# Altium PCB PCB1.PcbDoc
Units mil, origin at the board's own origin, x right, y up, seen from the top; angles counter-clockwise.
Board outline 5815 x 3685 mil, 2 copper layers (Top Layer, Bottom Layer); 31 components, 29 nets, 121 pads, 2 vias.
Unrouted connection lines stored in the file: 1.
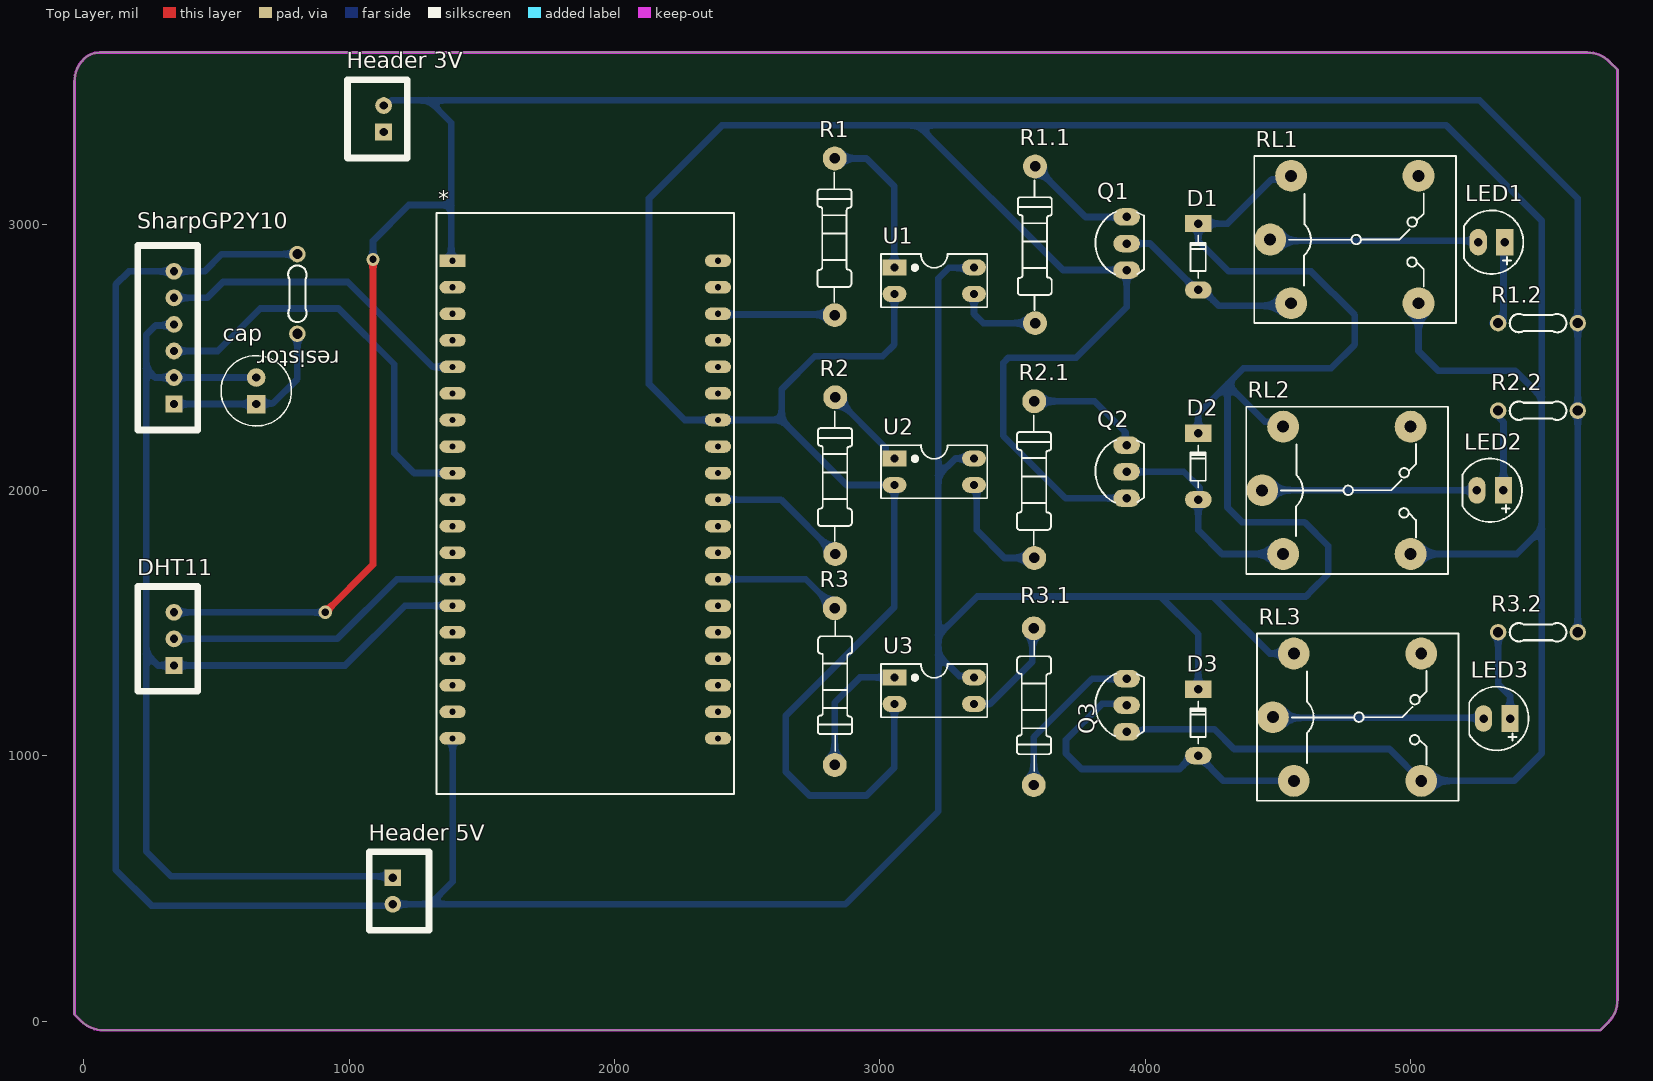
[diagram p0: Top Layer view]
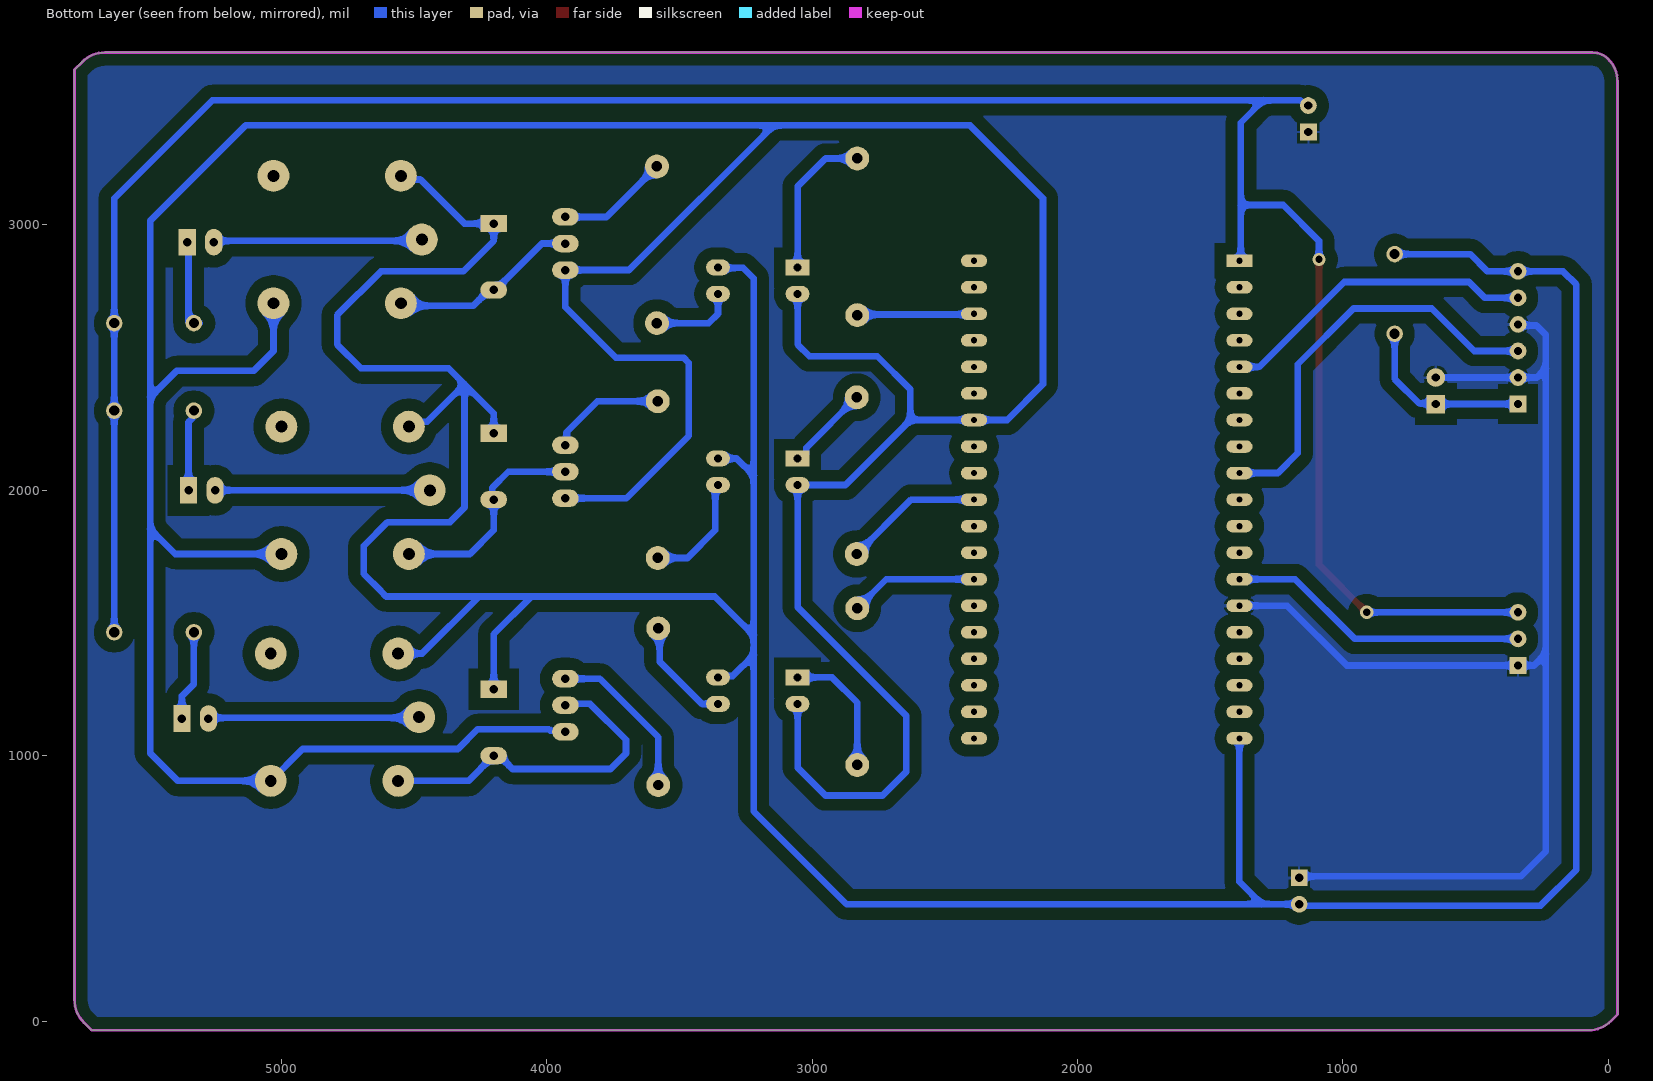
[diagram p1: Bottom Layer view, seen from below]
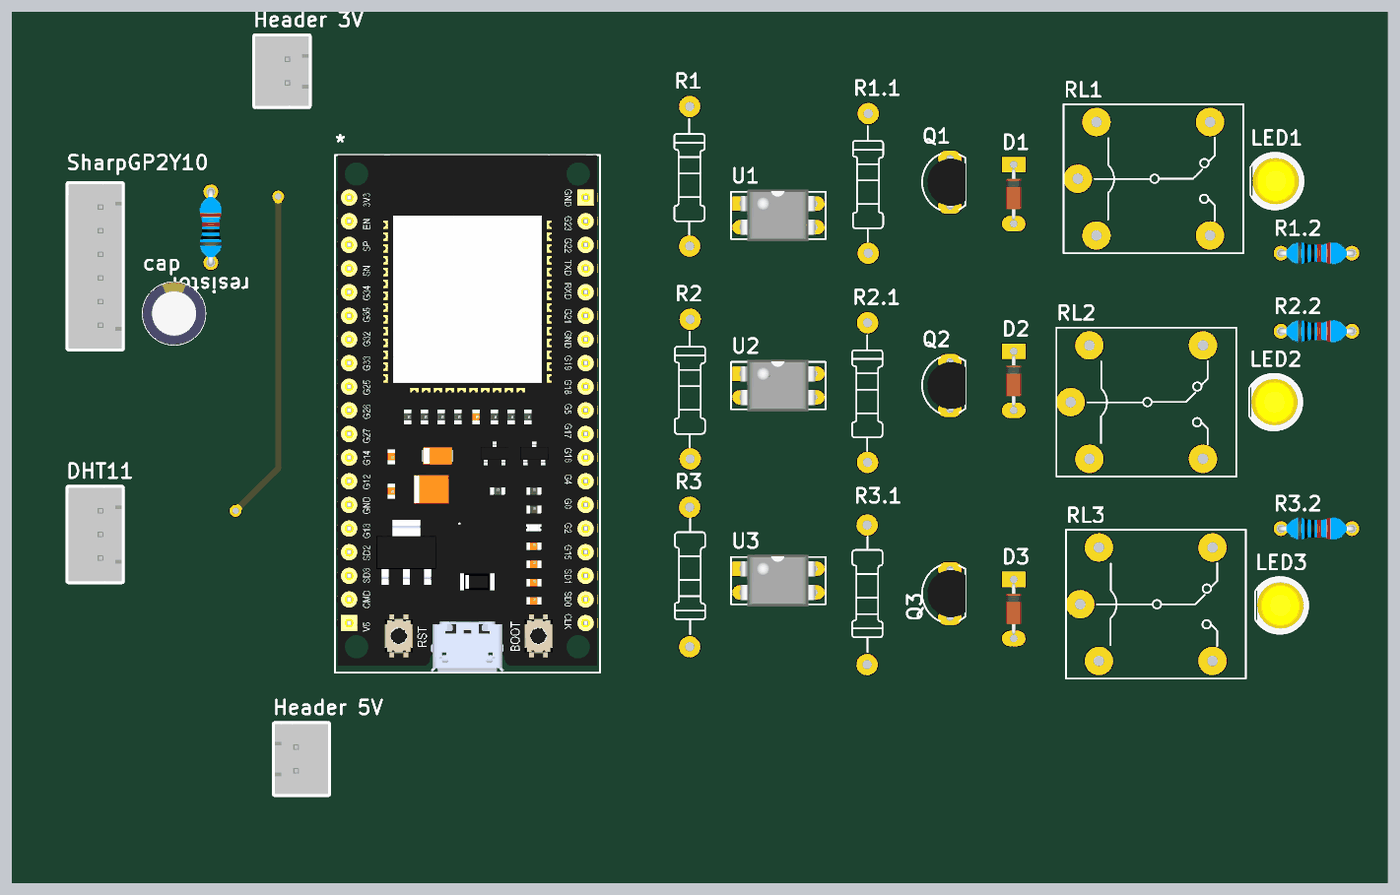
[diagram p2: 3D render of the assembled board from above, using the file's embedded part models]

## Layer stack, top to bottom
Top Solder: solder mask 0.4, Solder Resist, Dk 3.5
Top Layer: signal copper 1.4
Dielectric 1: dielectric 12.6, FR-4, Dk 4.8
Bottom Layer: signal copper 1.4
Bottom Solder: solder mask 0.4, Solder Resist, Dk 3.5

## Board outline
-35,25 -35,3540 cw(c85.71,3540) 0.36,3625.36 cw(c59.85,3565.86) 59.85,3650 5665,3650 cw(c5665,3529.29) 5750.36,3614.64 5780,3585 5780,80 cw(c5659.29,80) 5744.64,-5.36 5718.54,-31.46 cw(c5710,-22.93) 5710,-35 75,-35 cw(c75,85.71) -10.36,0.36

## Design rules (kind name [scope] priority, off if disabled: settings)
Clearance [All] p1: gap=45 ignorepadtopadclearanceinfootprint=FALSE
PolygonConnect [All] p1: connectstyle=Relief reliefconductorwidth=10 reliefentries=4 polygonreliefangle="90 Angle" airgapwidth=10
RoutingVias [All] p1: holewidth=28 width=50 viastyle="Through Hole" minholewidth=28 minwidth=50 maxholewidth=28 maxwidth=50
SolderMaskExpansion [All] p1: expansion=4 istentingtop=FALSE
Width [All] p1: maxlimit=40 minlimit=15 preferedwidth=30 toplayer_prefwidth=25 minimp=50.000000 maximp=50.000000 favimp=50.000000
30 further rules are at their usual default settings.

## Components (designator, comment, footprint, x,y, rotation, side; value= is the part's Value field where it differs from the comment)
* "ESP32 DEV KIT" "ESP32 DEVKIT" 1390,2865 r0 top
cap "220uF" CYL/D.250/LS.100 650,2375 r90 top
D1 "1N4007" D0.5A 4200,2880 r270 top
D2 "1N4007" D0.5A 4200,2090 r270 top
D3 "1N4007" D0.5A 4200,1125 r270 top
DHT11 "DHT11" XH2.54M-3 340,1340 r90 top
"Header 3V" "Header 3V" XH2.54M-2 1130,3350 r90 top
"Header 5V" "Header 5V" XH2.54M-2 1165,540 r270 top
LED1 "LED" led5mm_yellow 5355,2935 r180 top value="LED 3 ly Single Colour"
LED2 "LED" led5mm_yellow 5350,2000 r180 top value="LED 3 ly Single Colour"
LED3 "LED" led5mm_yellow 5375,1140 r180 top value="LED 3 ly Single Colour"
Q1 "C1815" QTO-92 3930,2930 r90 top
Q2 "C1815" QTO-92 3930,2070 r90 top
Q3 "C1815" QTO-92 3930,1190 r90 top
R1 "100" Res_15mm 2830,3250.55 r270 top value="R1W - 100"
R1.1 "100" Res_15mm 3585,3220.55 r270 top value="R1W - 100"
R1.2 "150" "R 1/4W/300" 5330,2630 r0 top
R2 "100" Res_15mm 2832,2350.55 r270 top value="R1W - 100"
R2.1 "100" Res_15mm 3582,2335.55 r270 top value="R1W - 100"
R2.2 "150" "R 1/4W/300" 5330,2300 r0 top
R3 "100" Res_15mm 2830,965 r90 top value="R1W - 100"
R3.1 "100" Res_15mm 3580,889.45 r90 top value="R1W - 100"
R3.2 "150" "R 1/4W/300" 5330,1465 r0 top
resistor "150" "R 1/4W/300" 805,2590 r90 top
RL1 "Relay 5v" RL_SPDT_10A 4470.94,2945 r0 top value="Relay SPDT, 10A, 12V"
RL2 "Relay 5v" RL_SPDT_10A 4440.94,2000 r0 top value="Relay SPDT, 10A, 12V"
RL3 "Relay 5v" RL_SPDT_10A 4481.26,1145 r0 top value="Relay SPDT, 10A, 12V"
SharpGP2Y10 "SharpGP2Y10" XH2.54M-6 340,2325 r90 top
U1 "PC817" DIP4/W0.3 3055,2840 r270 top
U2 "PC817" DIP4/W0.3 3055,2120 r270 top
U3 "PC817" DIP4/W0.3 3055,1295 r270 top

## Footprints (in the part's own frame and the unit in brackets; to place one, negate y for a bottom-side part, rotate by r counter-clockwise, add the part's x,y. Pads: shape width x height; smd on the part's side, far side on the other; paste and mask are expansions set on the pad)
CYL/D.250/LS.100 [mil]
  rect 70x70 hole 31: 1(-50,0)
  round 70 hole 31: 2(50,0)
  silkscreen extent -133,-133 133,133, body extent -134,-133 133,133, height 492
D0.5A [mil] "Diode muoi, W 80mil, L 300mil"
  oval 65x100 hole 32: 1(125,0)
  rect 65x100 hole 32: 2(-125,0)
  silkscreen extent -80,-30 80,28, body extent -108,-33 108,32, height 61
DIP4/W0.3 [mil] "4 PIN, W 300mil, Pin to pin 100mil"
  rect 60x90 hole 31: 1(0,0)
  oval 60x90 hole 31: 2(100,0) 3(100,300) 4(0,300)
  silkscreen extent -50,-50 150,350, body extent -59,-10 159,305, height 170
"ESP32 DEVKIT" [mm]
  rect 2.5x1.2 hole 0.6: 1(0,0)
  oval 2.5x1.2 hole 0.6: 2(0,-2.54) 3(0,-5.08) 4(0,-7.62) 5(0,-10.16) 6(0,-12.7) 7(0,-15.24) 8(0,-17.78) 9(0,-20.32) 10(0,-22.86) 11(0,-25.4) 12(0,-27.94) 13(0,-30.48) 14(0,-33.02) 15(0,-35.56) 16(0,-38.1) 17(0,-40.64) 18(0,-43.18) 19(0,-45.72) 20(25.4,-45.72) 21(25.4,-43.18) 22(25.4,-40.64) 23(25.4,-38.1) 24(25.4,-35.56) 25(25.4,-33.02) 26(25.4,-30.48) 27(25.4,-27.94) 28(25.4,-25.4) 29(25.4,-22.86) 30(25.4,-20.32) 31(25.4,-17.78) 32(25.4,-15.24) 33(25.4,-12.7) 34(25.4,-10.16) 35(25.4,-7.62) 36(25.4,-5.08) 37(25.4,-2.54) 38(25.4,0)
  silkscreen extent -1.52,-51.05 26.92,4.57, body extent -1.27,-50.99 26.67,4.59, height 9.68
led5mm_yellow [mil]
  rect 65x100 hole 32: 1(0,0)
  oval 65x100 hole 32: 2(100,0)
  silkscreen extent -70,-120 154,120, body extent -67,-118 146,119, height 347
QTO-92 [mil] "TO-92"
  oval 66x100 hole 32: 1(-100,0) 2(0,0) 3(100,0)
  silkscreen extent -117,-65 120,118, body extent -109,-66 109,95, height 245
"R 1/4W/300" [mil] "Through hole resitor, axial 300mils, 1/4W"
  round 62 hole 38: 1(0,0) 2(300,0)
  silkscreen extent 44,-35 257,35, body extent -12,-47 312,47, height 97
Res_15mm [mil]
  round 90 hole 39.37: 1(0,0) 2(590.55,0)
  silkscreen extent 53,-65 542,63
RL_SPDT_10A [mil] "Relay SPDT, 5 pin, 10A,W 650mil, L 800mil, H 800mil"
  round 120 hole 45: 1(0,0) 2(559.06,240) 3(559.06,-240) 4(78.74,-240) 5(78.74,240)
  silkscreen extent -60,-315 700,315, body extent -56,-315 701,315, height 606
XH2.54M-2 [mm]
  rect 1.6x1.6 hole 0.8: 1(0,0)
  round 1.6 hole 0.8: 2(2.54,0)
  silkscreen extent -2.48,-2.26 5.02,3.46, body extent -2.48,-2.26 5.02,3.48, height 6.91
XH2.54M-3 [mm]
  rect 1.6x1.6 hole 0.8: 1(0,0)
  round 1.6 hole 0.8: 2(2.54,0) 3(5.08,0)
  silkscreen extent -2.48,-2.26 7.56,3.46, body extent -2.48,-2.26 7.56,3.48, height 6.91
XH2.54M-6 [mm]
  rect 1.6x1.6 hole 0.8: 1(0,0)
  round 1.6 hole 0.8: 2(2.54,0) 3(5.08,0) 4(7.62,0) 5(10.16,0) 6(12.7,0)
  silkscreen extent -2.48,-2.26 15.18,3.46, body extent -2.48,-2.26 15.18,3.48, height 6.91

## Part data
cap: library part Capacitor, "Capacitor pol"
D1 D2 D3: library part D1A, "Diode 1A"
DHT11: library part "Header 3P 2.54 Duc Thang", "Cắm", Chung_Loai=Cắm, Don_Vi=Con, Ma_Hang=MH001292, Ten_Linh_Kien="Header 3P XH2.54-3P Đực Thẳng"
"Header 3V" "Header 5V": library part "Header 2P 2.54 Duc Thang", "Cắm", Chung_Loai=Cắm, Don_Vi=Con, Ma_Hang=MH001283, Ten_Linh_Kien="Header 2P XH2.54-2P Đực Thẳng"
LED1 LED2 LED3: "LED Single colour Green and Red"
Q1 Q2 Q3: "NPN 600mW, ECB"
R1 R1.1 R2 R2.1 R3 R3.1: library part R1W, "Resistor 1W"
R1.2 R2.2 R3.2 resistor: library part Resistor, "Resistor"
RL1 RL2 RL3: library part "Relay 1", "Relay SPDT,10A - 12VDC 5 Pin"
SharpGP2Y10: library part "Header 6P 2.54 Duc Thang", "Cắm", Chung_Loai=Cắm, Don_Vi=Con, Ma_Hang=MH001972, Ten_Linh_Kien="Header 6P XH2.54-6P Đực Thẳng"
U1 U2 U3: "Single Opto"

## Via types
v1: diameter 50, hole 28, Top Layer to Bottom Layer, 2 vias

## Nets (pads, with @x,y where several pads share a name; then routed paths per layer and width w, separated by ;. In a path a pad name is that pad's centre, name@x,y a point inside that pad or via, vN(x,y) a via of type N, cw(c..) or ccw(c..) an arc to the next point about the centre after c; other vN are vias at no path point)
3v3: "Header 3V.2" *.1 DHT11.3 R1.2.2 R2.2.2 R3.2.2 | length 9334.3
  Top Layer w25: v1(910,1540) 1090,1720 v1(1090,2870)
  Bottom Layer w25: DHT11.3 v1(910,1540) ; v1(1090,2870) 1090,2940 1225,3075 1385,3075 ; 1130,3450 1140.28,3450 1160.28,3470 1300,3470 ; *.1 1385,2870 1385,3075 ; R3.2.2 R2.2.2 R1.2.2 5630,3100 5260,3470 1300,3470 ; 1300,3470 1385,3385 1385,3075
5v: "Header 5V.2" *.19 D1.2 D2.2 D3.2 resistor.2 RL1.5 RL2.5 RL3.5 SharpGP2Y10.6 U1.4 U2.4 U3.4 | length 15126.1
  Bottom Layer w25: resistor.2 520,2890 455,2825 SharpGP2Y10.6 170,2825 120,2775 120,570 255,435 1160,435 1165,440 1305,440 ; *.19 1390,525 1305,440 ; U3.4 3349.87,1300.13 3299.67,1300.13 3220,1379.8 ; U2.4 3285,2120 3220,2055 ; U1.4 3353.02,2838.02 3260,2838.02 3220,2798.02 3220,2055 ; D3.2 4200,1458.02 4058.02,1600 ; D2.2 4200,2289.69 4310,2399.69 ; RL2.5 4501.51,2258.18 4451.51,2258.18 4310,2399.69 ; RL1.5 4535.58,3170.9 4475.9,3170.9 4310,3005 D1.2 4200,2940 4315,2825 4625,2825 4790,2660 4790,2550 4700,2460 4370.31,2460 4310,2399.69 ; RL3.5 4469.69,1385 4254.69,1600 ; 1305,440 2870,440 3220,790 3220,1379.8 ; 3220,1379.8 3220,1453.02 ; 3220,1453.02 3366.98,1600 4058.02,1600 ; 3220,1453.02 3220,2055 ; 4058.02,1600 4254.69,1600 ; 4254.69,1600 4605.36,1600 4625,1619.64 4625,1620 4690,1685 4690,1790 4600,1880 4365,1880 4310,1935 4310,2399.69
com1: LED1.2 RL1.1 | length 788.2
  Bottom Layer w25: RL1.1 4475.94,2940 5250,2940 LED1.2
com2: LED2.2 RL2.1 | length 809.1
  Bottom Layer w25: RL2.1 LED2.2
com3: LED3.2 RL3.1 | length 795.8
  Bottom Layer w25: RL3.1 4483.76,1142.5 5272.5,1142.5 LED3.2
data: *.13 DHT11.2 | length 1143.2
  Bottom Layer w25: DHT11.2 955,1440 1180,1665 *.13
gnd1: "Header 3V.1" "Header 5V.1" *.14 cap.2 DHT11.1 SharpGP2Y10.2 SharpGP2Y10.4 | length 4734.2
  Bottom Layer w25: SharpGP2Y10.4 336,2621 271,2621 235,2585 235,2459.64 ; cap.2 SharpGP2Y10.2 269.64,2425 235,2459.64 ; 1165,540 1160,545 330,545 235,640 235,1385 ; *.14 1210,1565 985,1340 DHT11.1 280,1340 235,1385 ; 235,1385 235,2459.64
gnd3: *.32 Q1.1 Q2.1 Q3.1 RL1.3 RL2.3 RL3.3 U1.2 U2.2 U3.2 | length 15681.8
  Bottom Layer w25: U3.2 3055,955 2950,850 2735,850 2645,940 2645,1150 3055,1560 U2.2 2875,2020 2630,2265 ; U1.2 3055,2550 3010,2505 2755,2505 2630,2380 2630,2265 ; Q3.1 3934.5,1094.5 3986.56,1094.5 3992.06,1100 4260,1100 4335,1025 4920.31,1025 4927.64,1017.68 RL3.3 5390,905 5495,1010 5495,1855 ; Q2.1 3700,1970 3465,2205 3465,2480 3485,2500 3740,2500 3930,2690 Q1.1 3690,2830 3145,3375 ; RL2.3 5400,1760 5495,1855 ; RL1.3 5030,2525 5105,2450 5395,2450 5495,2350 ; 2630,2265 *.32 2265,2265 2130,2400 2130,3100 2405,3375 3145,3375 ; 3145,3375 5135,3375 5495,3015 5495,2350 ; 5495,1855 5495,2350
led: *.9 SharpGP2Y10.3 | length 1569.3
  Bottom Layer w25: SharpGP2Y10.3 505,2525 665,2685 960,2685 1170,2475 1170,2140 1245,2065 *.9
led_dust: *.26 R3.2 | length 485.3
  Bottom Layer w25: *.26 2720.55,1665 R3.2
led_hum: *.29 R2.2 | length 526.9
  Bottom Layer w25: *.29 2627,1965 R2.2
led_temp: *.36 R1.2 | length 442.1
  Bottom Layer w25: *.36 2392.5,2662.5 2827.5,2662.5 R1.2
NetD1_1: D1.1 Q1.2 RL1.4 | length 721.2
  Bottom Layer w25: Q1.2 4018.32,2930 4174.85,2773.48 4193.32,2755 D1.1 4217.5,2755 4277.5,2695 4539.69,2695 RL1.4
NetD2_1: D2.1 Q2.2 RL2.4 | length 818.9
  Bottom Layer w25: Q2.2 4145,2070 4205,2010 4205,1970 D2.1 4200,1850 4290,1760 RL2.4
NetD3_1: D3.1 Q3.2 RL3.4 | length 1280.6
  Bottom Layer w25: Q3.2 3925,1195 3836.6,1195 3701.6,1060 3701.6,1008.4 3760,950 4129.1,950 4179.1,1000 D3.1 4295,905 RL3.4
NetLED1_1: LED1.1 R1.2.1 | length 309.1
  Bottom Layer w25: R1.2.1@5307.5,2630 R1.2.1@5312.5,2635 ; R1.2.1@5350,2635 5350,2930 LED1.1
NetLED2_1: LED2.1 R2.2.1 | length 308.3
  Bottom Layer w25: R2.2.1 5337.08,2292.92 5337.08,2269.78 5350,2256.86 LED2.1
NetLED3_1: LED3.1 R3.2.1 | length 343.6
  Bottom Layer w25: R3.2.1 5330,1270 5375,1225 LED3.1
NetQ1_3: Q1.3 R1.1.1 | length 423.9
  Bottom Layer w25: R1.1.1 3775.55,3030 Q1.3
NetQ2_3: Q2.3 R2.1.1 | length 442.9
  Bottom Layer w25: R2.1.1 3809.45,2335.55 3925,2220 3925,2175 Q2.3
NetQ3_3: Q3.3 R3.1.1 | length 621.7
  Bottom Layer w25: R3.1.1 3580,1070 3800,1290 Q3.3
NetR1.1_2: R1.1.2 U1.3 | length 319.5
  Bottom Layer w25: U1.3 3355,2665 3390,2630 R1.1.2
NetR1_1: R1.1 U1.1 | length 573.7
  Bottom Layer w25: R1.1 2949.45,3250.55 3055,3145 U1.1
NetR2.1_2: R2.1.2 U2.3 | length 434.6
  Bottom Layer w25: U2.3 3365,2010 3365,1850 3470,1745 R2.1.2
NetR2_1: R2.1 U2.1 | length 331.7
  Bottom Layer w25: R2.1 3022.5,2160.05 3022.5,2137.5 3040,2120 U2.1
NetR3.1_2: R3.1.2 U3.3 | length 413.3
  Bottom Layer w25: U3.3 3355.23,1195.23 3415.23,1195.23 3575,1355 3575,1475 R3.1.2
NetR3_1: R3.1 U3.1 | length 499.4
  Bottom Layer w25: R3.1 2830,1200 2925,1295 U3.1
res: cap.1 resistor.1 SharpGP2Y10.1 | length 674.4
  Bottom Layer w25: SharpGP2Y10.1 cap.1 652.5,2327.5 712.5,2327.5 805,2420 resistor.1
v0: *.5 SharpGP2Y10.5 | length 1207.4
  Bottom Layer w25: SharpGP2Y10.5 465,2725 525,2785 995,2785 1315,2465 *.5
pads on no net: *.2 *.3 *.4 *.6 *.7 *.8 *.10 *.11 *.12 *.15 *.16 *.17 *.18 *.20 *.21 *.22 *.23 *.24 *.25 *.27 *.28 *.30 *.31 *.33 *.34 *.35 *.37 *.38 RL1.2 RL2.2 RL3.2

## Polygon pours and split planes (outlines as drawn)
gnd1 on Bottom Layer "GND1_L02_P004" (solid, remove dead copper, pour order 4): -35,3570 cw(c45,3570) 45,3650 5705,3650 cw(c5705,3575) 5780,3575 5780,65 cw(c5680,65) 5680,-35 65,-35 cw(c65,65) -35,65

## Keep-outs
Keep-Out Layer:
  the board outline again, w10